# Altium PCB TB6600_Base.PcbDoc (part 4 of 4)
Units mm, origin at the board's own origin, x right, y up, seen from the top; angles counter-clockwise.
Board outline 300 x 300 mm, 2 copper layers (Top Layer, Bottom Layer); 129 components, 65 nets, 411 pads, 153 vias.
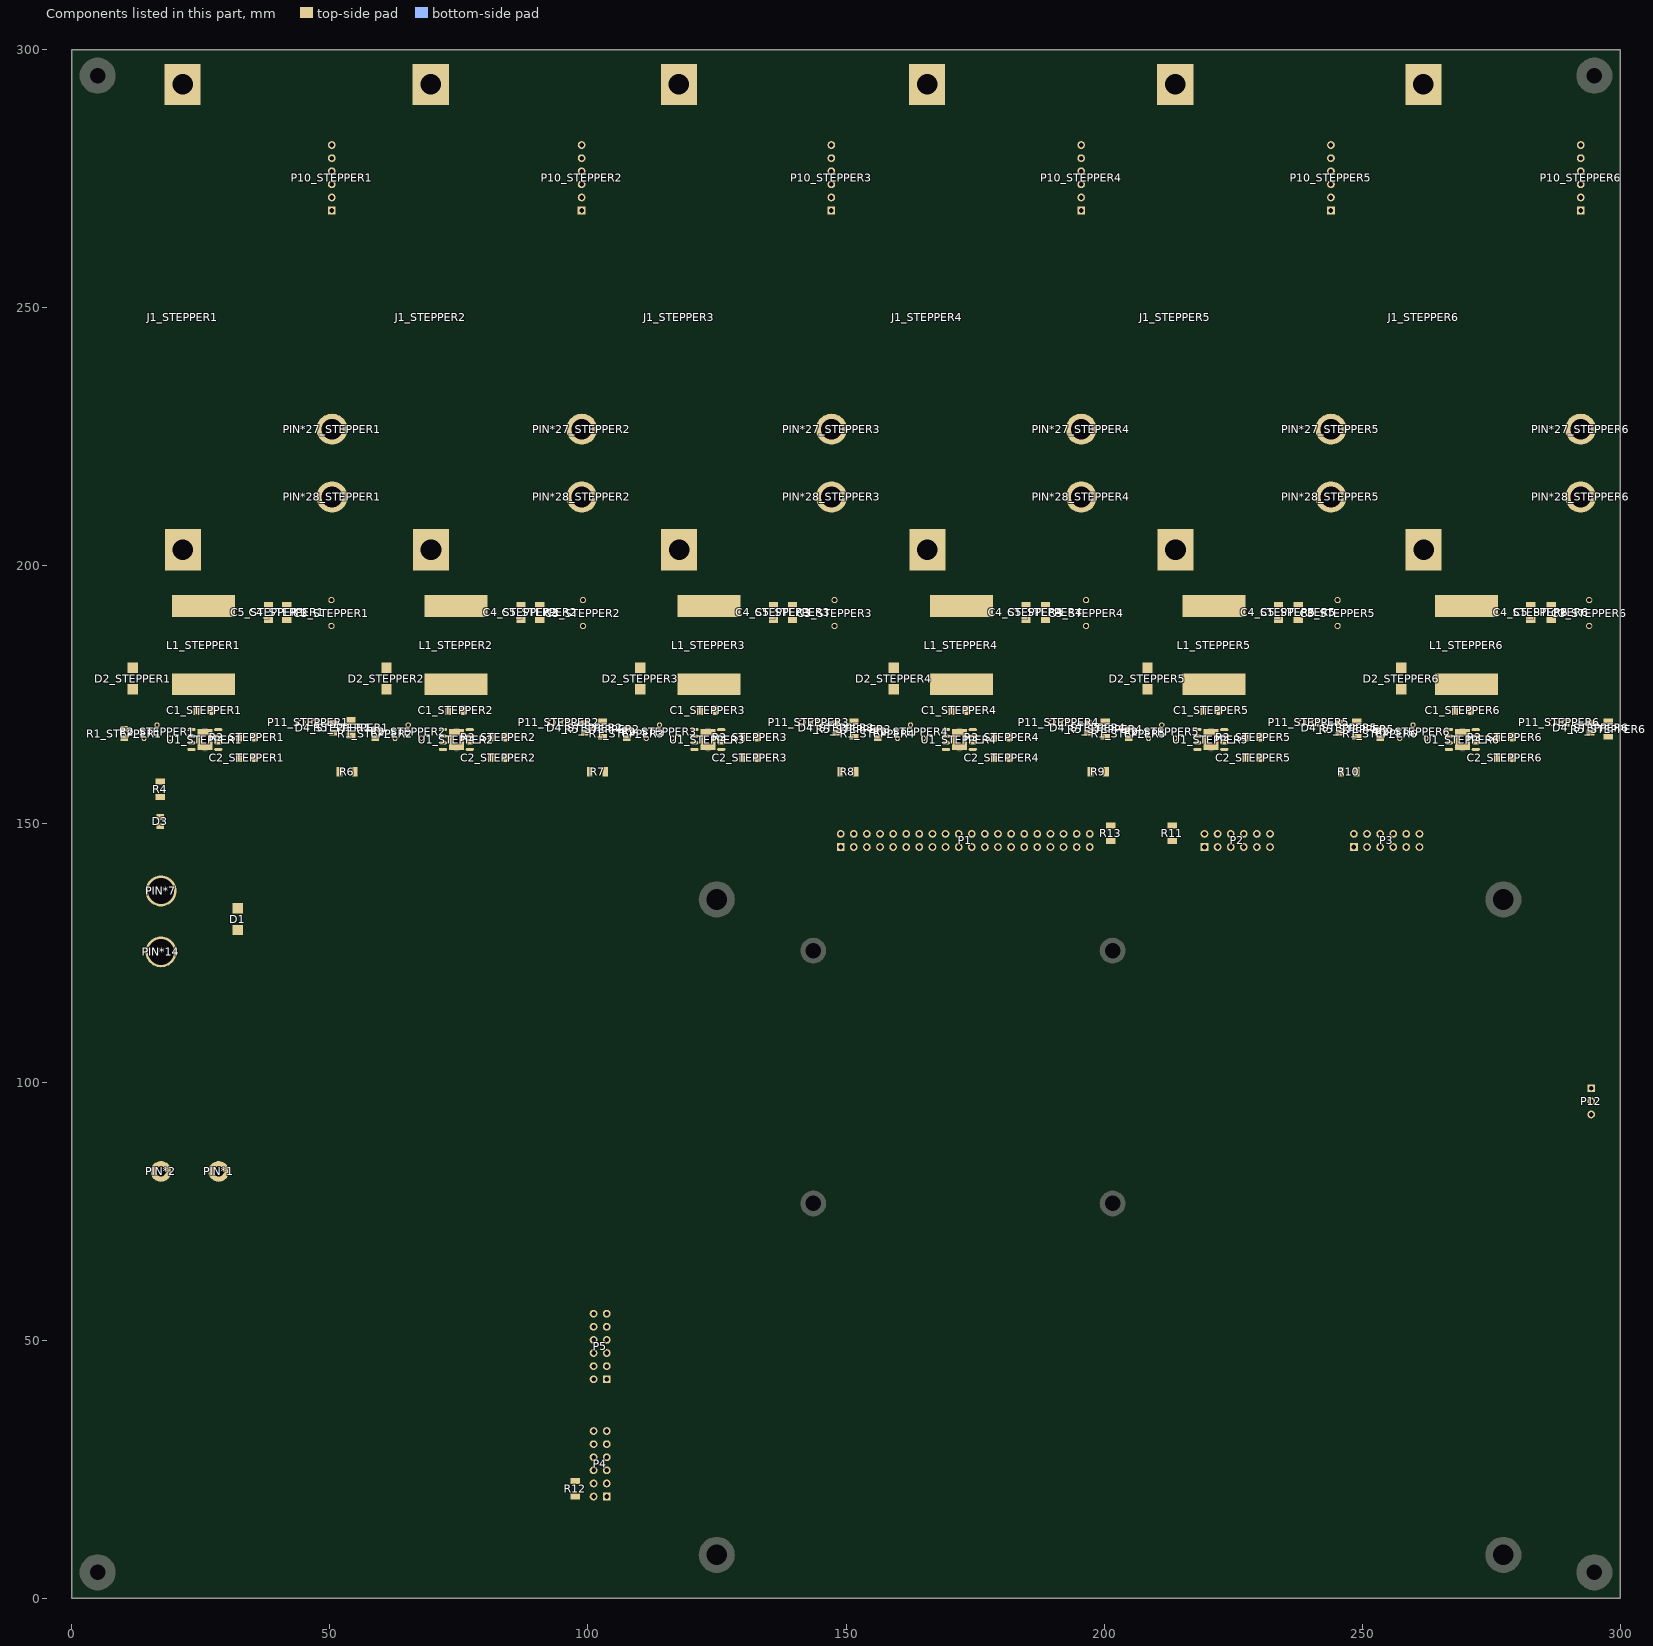
[diagram p4: the components of this part, seen from the top]

## Via types
v1: diameter 0.65, hole 0.3, Top Layer to Bottom Layer, tented both sides, 153 vias

## Nets (pads, with @x,y where several pads share a name; then routed paths per layer and width w, separated by ;. In a path a pad name is that pad's centre, name@x,y a point inside that pad or via, vN(x,y) a via of type N, cw(c..) or ccw(c..) an arc to the next point about the centre after c; other vN are vias at no path point) (continued)
copper on no net: (continued)
  Top Layer w0.254: 263.948,24.13 264.287,24.13 ; 263.948,41.148 264.287,41.148 ; 263.948,41.402 264.033,41.402 ; 264.202,19.304 264.287,19.304 ; 264.202,19.558 264.541,19.558 ; 264.202,22.606 264.287,22.606 ; 264.202,22.86 264.541,22.86 ; 264.202,23.876 264.541,23.876 ; 264.202,28.194 264.795,28.194 ; 264.202,32.004 264.287,32.004 ; 264.202,32.258 264.541,32.258 ; 264.202,33.528 264.541,33.528 ; 264.202,33.782 264.541,33.782 ; 264.202,40.64 264.541,40.64 ; 264.202,40.894 264.287,40.894 ; 264.456,19.812 264.541,19.812 ; 264.456,20.066 264.795,20.066 ; 264.456,20.32 264.795,20.32 ; 264.456,23.114 264.541,23.114 ; 264.456,23.368 264.541,23.368 ; 264.456,23.622 264.541,23.622 ; 264.456,26.162 264.795,26.162 ; 264.456,26.416 264.795,26.416 ; 264.456,26.67 264.795,26.67 ; 264.456,26.924 264.795,26.924 ; 264.456,27.178 264.795,27.178 ; 264.456,27.432 264.795,27.432 ; 264.456,30.226 264.795,30.226 ; 264.456,32.512 264.541,32.512 ; 264.456,32.766 264.541,32.766 ; 264.456,33.02 264.541,33.02 ; 264.456,33.274 264.541,33.274 ; 264.456,39.878 264.795,39.878 ; 264.456,40.132 264.541,40.132 ; 264.456,40.386 264.541,40.386 ; 264.71,20.574 264.795,20.574 ; 264.71,20.828 265.049,20.828 ; 264.71,28.448 264.795,28.448 ; 264.71,28.702 265.049,28.702 ; 264.71,29.718 265.049,29.718 ; 264.71,29.972 265.049,29.972 ; 264.71,39.116 265.049,39.116 ; 264.71,39.37 265.049,39.37 ; 264.71,39.624 264.795,39.624 ; 264.964,21.082 265.049,21.082 ; 264.964,21.336 265.049,21.336 ; 264.964,21.59 265.303,21.59 ; 264.964,28.956 265.049,28.956 ; 264.964,29.21 265.049,29.21 ; 264.964,29.464 265.049,29.464 ; 264.964,38.354 265.303,38.354 ; 264.964,38.608 265.303,38.608 ; 264.964,38.862 265.049,38.862 ; 265.218,21.844 265.303,21.844 ; 265.218,22.098 265.303,22.098 ; 265.218,22.352 265.557,22.352 ; 265.218,22.606 265.557,22.606 ; 265.218,37.592 265.557,37.592 ; 265.218,37.846 265.557,37.846 ; 265.218,38.1 265.303,38.1 ; 265.472,22.86 265.557,22.86 ; 265.472,23.114 265.557,23.114 ; 265.472,23.368 265.811,23.368 ; 265.472,23.622 265.811,23.622 ; 265.472,36.576 265.811,36.576 ; 265.472,36.83 265.811,36.83 ; 265.472,37.084 265.557,37.084 ; 265.472,37.338 265.557,37.338 ; 265.726,23.876 265.811,23.876 ; 265.726,24.13 265.811,24.13 ; 265.726,24.384 266.065,24.384 ; 265.726,24.638 266.065,24.638 ; 265.726,35.56 266.065,35.56 ; 265.726,35.814 266.065,35.814 ; 265.726,36.068 265.811,36.068 ; 265.726,36.322 265.811,36.322 ; 265.98,24.892 266.065,24.892 ; 265.98,25.146 266.065,25.146 ; 265.98,25.4 266.065,25.4 ; 265.98,25.654 266.065,25.654 ; 265.98,25.908 266.319,25.908 ; 265.98,26.162 266.319,26.162 ; 265.98,33.782 266.319,33.782 ; 265.98,34.036 266.319,34.036 ; 265.98,34.29 266.319,34.29 ; 265.98,34.544 266.065,34.544 ; 265.98,34.798 266.065,34.798 ; 265.98,35.052 266.065,35.052 ; 265.98,35.306 266.065,35.306 ; 266.234,26.416 266.319,26.416 ; 266.234,26.67 266.319,26.67 ; 266.234,26.924 266.319,26.924 ; 266.234,27.178 266.319,27.178 ; 266.234,27.432 266.319,27.432 ; 266.234,27.686 266.319,27.686 ; 266.234,27.94 266.573,27.94 ; 266.234,28.194 266.573,28.194 ; 266.234,28.448 266.573,28.448 ; 266.234,28.702 266.573,28.702 ; 266.234,28.956 266.573,28.956 ; 266.234,29.21 266.573,29.21 ; 266.234,29.464 266.573,29.464 ; 266.234,29.718 266.573,29.718 ; 266.234,29.972 266.573,29.972 ; 266.234,30.226 266.573,30.226 ; 266.234,30.48 266.573,30.48 ; 266.234,30.734 266.573,30.734 ; 266.234,30.988 266.573,30.988 ; 266.234,31.242 266.573,31.242 ; 266.234,31.496 266.573,31.496 ; 266.234,31.75 266.573,31.75 ; 266.234,32.004 266.573,32.004 ; 266.234,32.258 266.319,32.258 ; 266.234,32.512 266.319,32.512 ; 266.234,32.766 266.319,32.766 ; 266.234,33.02 266.319,33.02 ; 266.234,33.274 266.319,33.274 ; 266.234,33.528 266.319,33.528

## Polygon pours and split planes (outlines as drawn)
EGND on Bottom Layer "EGND_L02_P018" (solid, remove dead copper, pour order 18): 299.987,184.531 299.974,184.518 299.974,158.496 285.242,158.496 285.242,208.28 299.987,208.28
EGND on Bottom Layer "EGND_L02_P016" (solid, remove dead copper, pour order 16): 0,0.381 0,0 82.804,0 82.804,139.065 41.656,139.065 41.656,131.953 13.589,131.953 13.462,132.08 13.462,183.896 299.974,183.896 300,183.922 300,236.093 0,236.093
GND on Bottom Layer "GND_L02_P010" (solid, remove dead copper, pour order 10): 274.574,284.988 274.574,145.28 284.861,145.28 284.861,165.1 284.988,165.227 284.988,284.988
GND on Bottom Layer "GND_L02_P008" (solid, remove dead copper, pour order 8): 0,300 300,300 300,237.617 0,237.617
GND on Bottom Layer "GND_L02_P002" (solid, remove dead copper, pour order 2): 299.974,0 299.974,2.641 300,2.667 300,157.327 299.974,157.353 138.938,157.353 138.938,139.192 83.82,139.192 83.82,0
EGND on Top Layer "EGND_L01_P012" (solid, remove dead copper, pour order 12): 0,0 82.804,0 82.804,149.479 78.105,149.479 78.105,158.496 300,158.496 300,236.067 299.974,236.093 0,236.093
GND on Top Layer "GND_L01_P006" (solid, remove dead copper, pour order 6): 0,300 300,300 300,237.744 0.519,237.744
GND on Top Layer "GND_L01_P004" (solid, remove dead copper, pour order 4): 300,0 300,157.353 138.938,157.353 138.938,139.192 83.82,139.192 83.82,0

## Keep-outs
Keep-Out Layer:
  circle w0.254: c22.987,61.214 r8
  lines w0.254: 0,1.27 ccw(c1.397,1.397) 1.524,0 298.196,0 ccw(c298.196,1.804) 300,1.804 300,297.662 ccw(c297.662,297.662) 297.662,300 3.074,300 ccw(c3.074,296.926) 0,296.926 0,1.27

## Other copper
Top Layer:
  pour cut-out: 46.736,210.058 295.91,210.058 295.91,217.17 46.736,217.17
  region net VCC: 41.021,132.588 41.021,149.606 14.224,149.606 14.224,132.588
  region net NetC1_STEPPER6_1: 266.065,168.275 267.589,168.275 267.589,172.974 266.065,172.974
  region net NetC1_STEPPER6_2: 272.859,168.275 271.272,168.275 271.272,175.26 272.859,175.26
  region net NetC1_STEPPER6_2: 256.54,177.075 256.54,175.133 264.922,175.133 264.922,177.038
  region net NetC1_STEPPER5_1: 217.297,168.275 218.821,168.275 218.821,172.974 217.297,172.974
  region net NetC1_STEPPER5_2: 224.041,168.275 222.504,168.275 222.504,175.26 224.041,175.26
  region net NetC1_STEPPER5_2: 207.391,177.076 207.391,175.133 216.154,175.133 216.154,177.038
  region net NetC1_STEPPER4_1: 168.656,168.275 170.053,168.275 170.053,172.974 168.656,172.974
  region net NetC1_STEPPER4_2: 175.387,168.275 173.863,168.275 173.863,175.26 175.387,175.26
  region net NetC1_STEPPER4_2: 158.242,177.078 158.242,175.133 167.386,175.133 167.386,177.038
  region net NetC1_STEPPER3_1: 119.888,168.275 121.412,168.275 121.412,172.974 119.888,172.974
  region net NetC1_STEPPER3_2: 126.619,168.275 125.095,168.275 125.095,175.26 126.619,175.26
  region net NetC1_STEPPER3_2: 109.093,177.08 109.093,175.133 118.618,175.133 118.618,177.038
  region net NetC1_STEPPER2_1: 71.12,168.275 72.644,168.275 72.644,172.974 71.12,172.974
  region net NetC1_STEPPER2_2: 77.851,168.275 76.327,168.275 76.327,175.26 77.851,175.26
  region net NetC1_STEPPER2_2: 59.944,177.081 59.944,175.133 69.85,175.133 69.85,177.038
  region net VM_STEPPER6: 281.559,191.897 295.402,191.897 295.402,216.662 289.306,216.662 289.306,196.596 264.16,196.596 264.16,192.016
  region net VM_STEPPER5: 232.816,191.897 247.015,191.897 247.015,216.662 240.919,216.662 240.919,196.596 215.265,196.596 215.265,192.017
  region net VM_STEPPER4: 184.074,191.897 198.628,191.897 198.628,216.662 192.532,216.662 192.532,196.596 166.243,196.596 166.243,192.019
  region net VM_STEPPER3: 135.331,191.897 150.241,191.897 150.241,216.662 144.272,216.662 144.272,196.596 117.348,196.596 117.348,192.02
  region net VM_STEPPER2: 86.589,191.897 101.727,191.897 101.727,216.662 95.758,216.662 95.758,196.596 68.326,196.596 68.326,192.022
  region net VM_STEPPER1: 37.846,191.897 53.594,191.897 53.594,216.662 47.371,216.662 47.371,196.596 19.304,196.596 19.304,192.024
  region net NetC1_STEPPER1_2: 10.795,177.083 10.795,175.133 21.082,175.133 21.082,177.038
  region net NetC1_STEPPER1_2: 29.21,168.275 27.559,168.275 27.559,175.26 29.21,175.26
  region: 29.21,168.275
  region net NetC1_STEPPER1_1: 22.352,168.275 24.003,168.275 24.003,172.974 22.352,172.974
Bottom Layer:
  pour cut-out: 288.671,217.043 296.164,217.043 296.164,209.804 288.671,209.804
  pour cut-out: 240.284,217.043 247.777,217.043 247.777,209.804 240.284,209.804
  pour cut-out: 191.897,217.043 199.39,217.043 199.39,209.804 191.897,209.804
  pour cut-out: 143.51,217.043 151.003,217.043 151.003,209.804 143.51,209.804
  pour cut-out: 95.123,217.043 102.616,217.043 102.616,209.804 95.123,209.804
  pour cut-out: 46.736,217.043 54.229,217.043 54.229,209.804 46.736,209.804
  pour cut-out: 46.99,216.662
  region net VCC: 37.211,176.911 78.613,176.911 78.613,166.624 76.2,166.624 76.2,172.847 37.211,172.847
  region net VCC: 27.686,176.911 41.021,176.911 41.021,148.082 41.148,147.955 34.798,147.955 34.798,166.497 34.671,166.624 27.686,166.624
  region net VCC: 137.541,167.903 137.541,140.589 34.798,140.589 34.798,149.606 128.27,149.606 128.27,167.903
  region net VCC: 222.504,166.624 224.79,166.624 224.79,172.847 222.504,172.847
  region: 176.657,169.164
  region net VCC: 176.022,166.624 176.022,172.593 173.863,172.593 173.863,166.624
  region net VCC: 272.923,166.624 271.145,166.624 271.145,171.958 137.541,171.958 137.541,166.624 125.476,166.624 124.968,166.624 124.968,179.197 124.841,179.324 272.923,179.324
Multi-Layer:
  pour cut-out: 13.462,150.368 41.656,150.368 41.656,131.953 13.589,131.953 13.462,132.08

## Silkscreen, mask and mechanical layers (free items; w line width, h text height)
Top Overlay:
  drawing of 4077 lines, arcs and shapes, not listed
  text "ENA" at 52.451,278.384 h1.5
  text "ENA" at 100.847,278.384 h1.5
  text "ENA" at 149.244,278.384 h1.5
  text "ENA" at 197.658,278.384 h1.5
  text "ENA" at 246.036,278.384 h1.5
  text "ENA" at 294.432,278.384 h1.5
  text "DIR" at 52.451,273.431 h1.5
  text "DIR" at 100.847,273.431 h1.5
  text "DIR" at 149.244,273.431 h1.5
  text "DIR" at 197.658,273.431 h1.5
  text "DIR" at 246.036,273.431 h1.5
  text "DIR" at 294.432,273.431 h1.5
  text "PLUSE" at 52.451,268.224 h1.5
  text "PLUSE" at 100.847,268.224 h1.5
  text "PLUSE" at 149.244,268.224 h1.5
  text "PLUSE" at 197.658,268.224 h1.5
  text "PLUSE" at 246.036,268.224 h1.5
  text "PLUSE" at 294.432,268.224 h1.5
  text "EGND" at 45.72,231.521 h5
  text "EGND" at 94.107,231.521 h5
  text "EGND" at 142.494,231.521 h5
  text "EGND" at 190.881,231.521 h5
  text "EGND" at 239.268,231.521 h5
  text "EGND" at 287.655,231.521 h5
  text "VM" at 47.879,204.851 h5
  text "VM" at 96.266,204.851 h5
  text "VM" at 144.653,204.851 h5
  text "VM" at 193.04,204.851 h5
  text "VM" at 241.427,204.851 h5
  text "VM" at 289.814,204.851 h5
  text "VCC" at 9.779,133.985 h5 r90
  text "EGND" at 9.779,120.396 h5 r90
  text "GND" at 288.925,98.171 h2
  text "TXD" at 288.925,95.631 h2
  text "RXD" at 288.925,92.964 h2
Mechanical 15:
  lines w0.254: 172.662,116.537 172.662,138.635 ; 121.158,4.572 121.158,139.192 281.178,139.192 281.178,4.572 121.158,4.572 ; 140.162,72.976 140.162,128.976 236.428,128.976 236.428,72.976 140.162,72.976
  text "挖空" at 16.891,58.42 h7